# Altium PCB 20251212.PcbDoc
Units mm, origin at the board's own origin, x right, y up, seen from the top; angles counter-clockwise.
Board outline 125 x 100 mm, 2 copper layers (Top Layer, Bottom Layer); 101 components, 65 nets, 339 pads, 4 vias.
Unrouted connection lines stored in the file: 70.
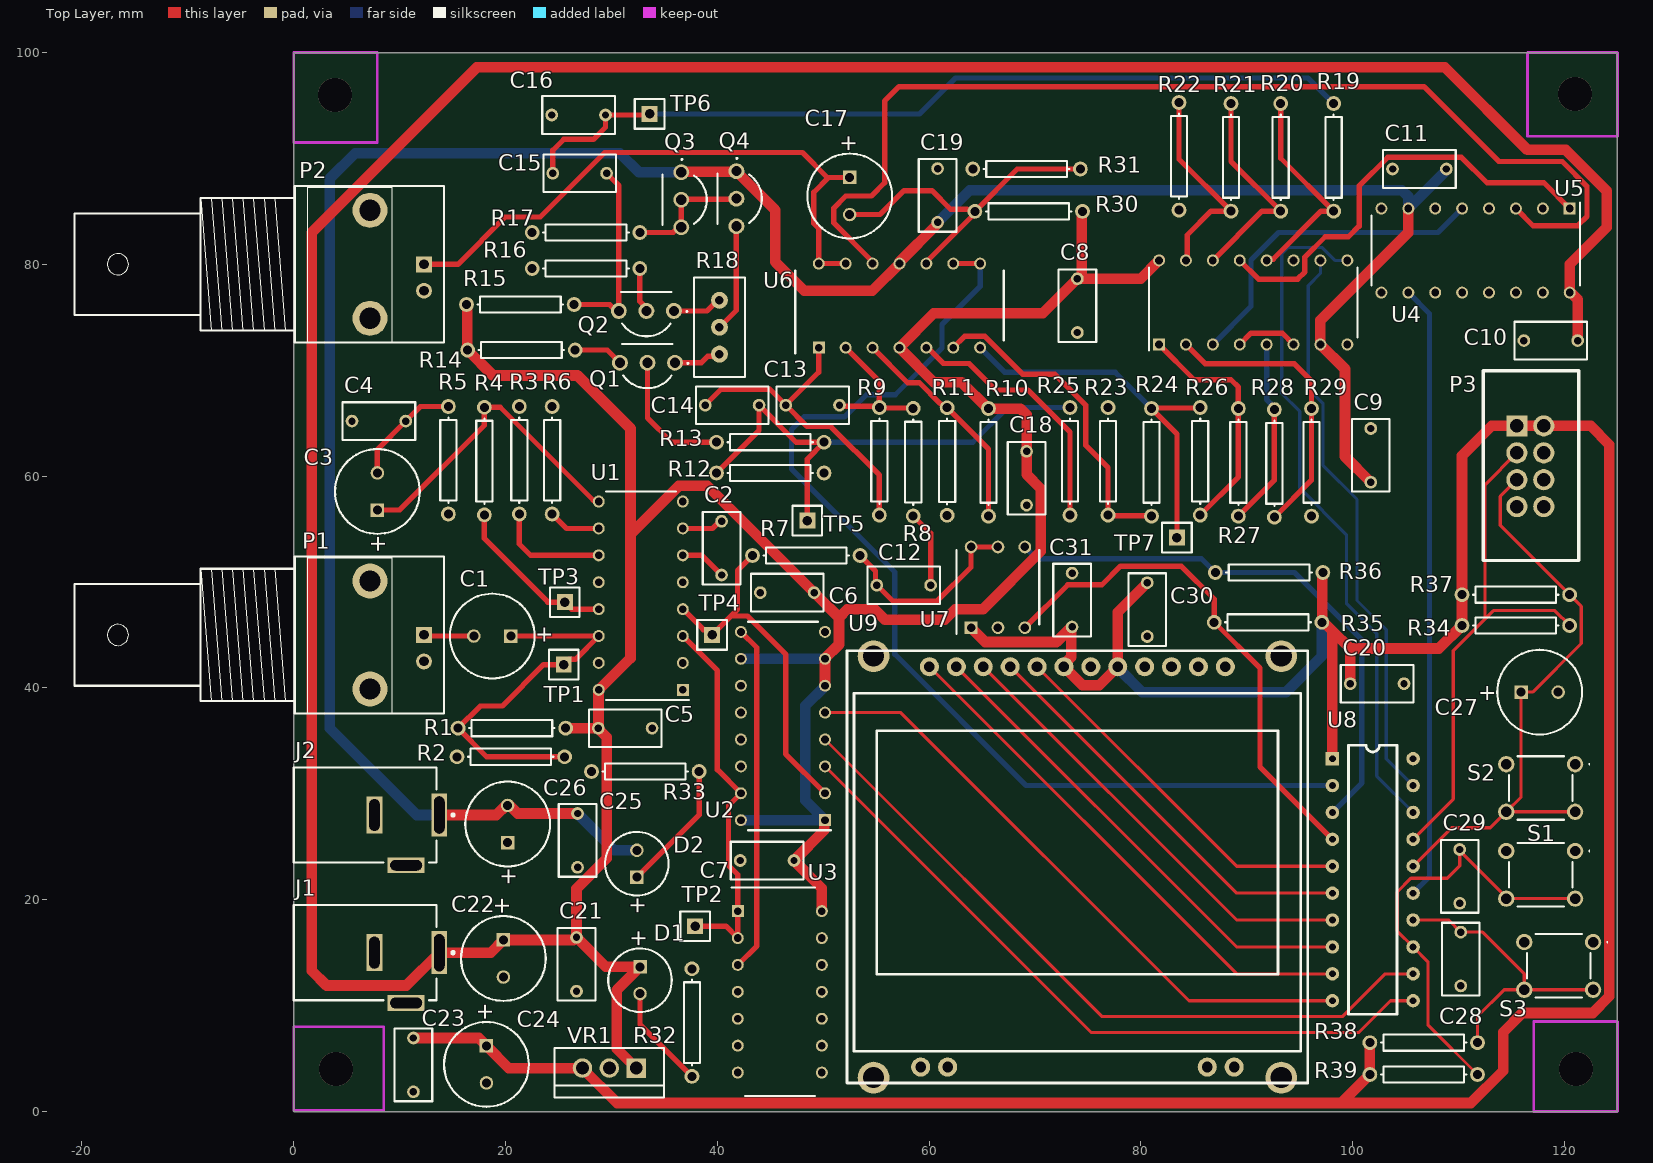
[diagram p0: Top Layer view]
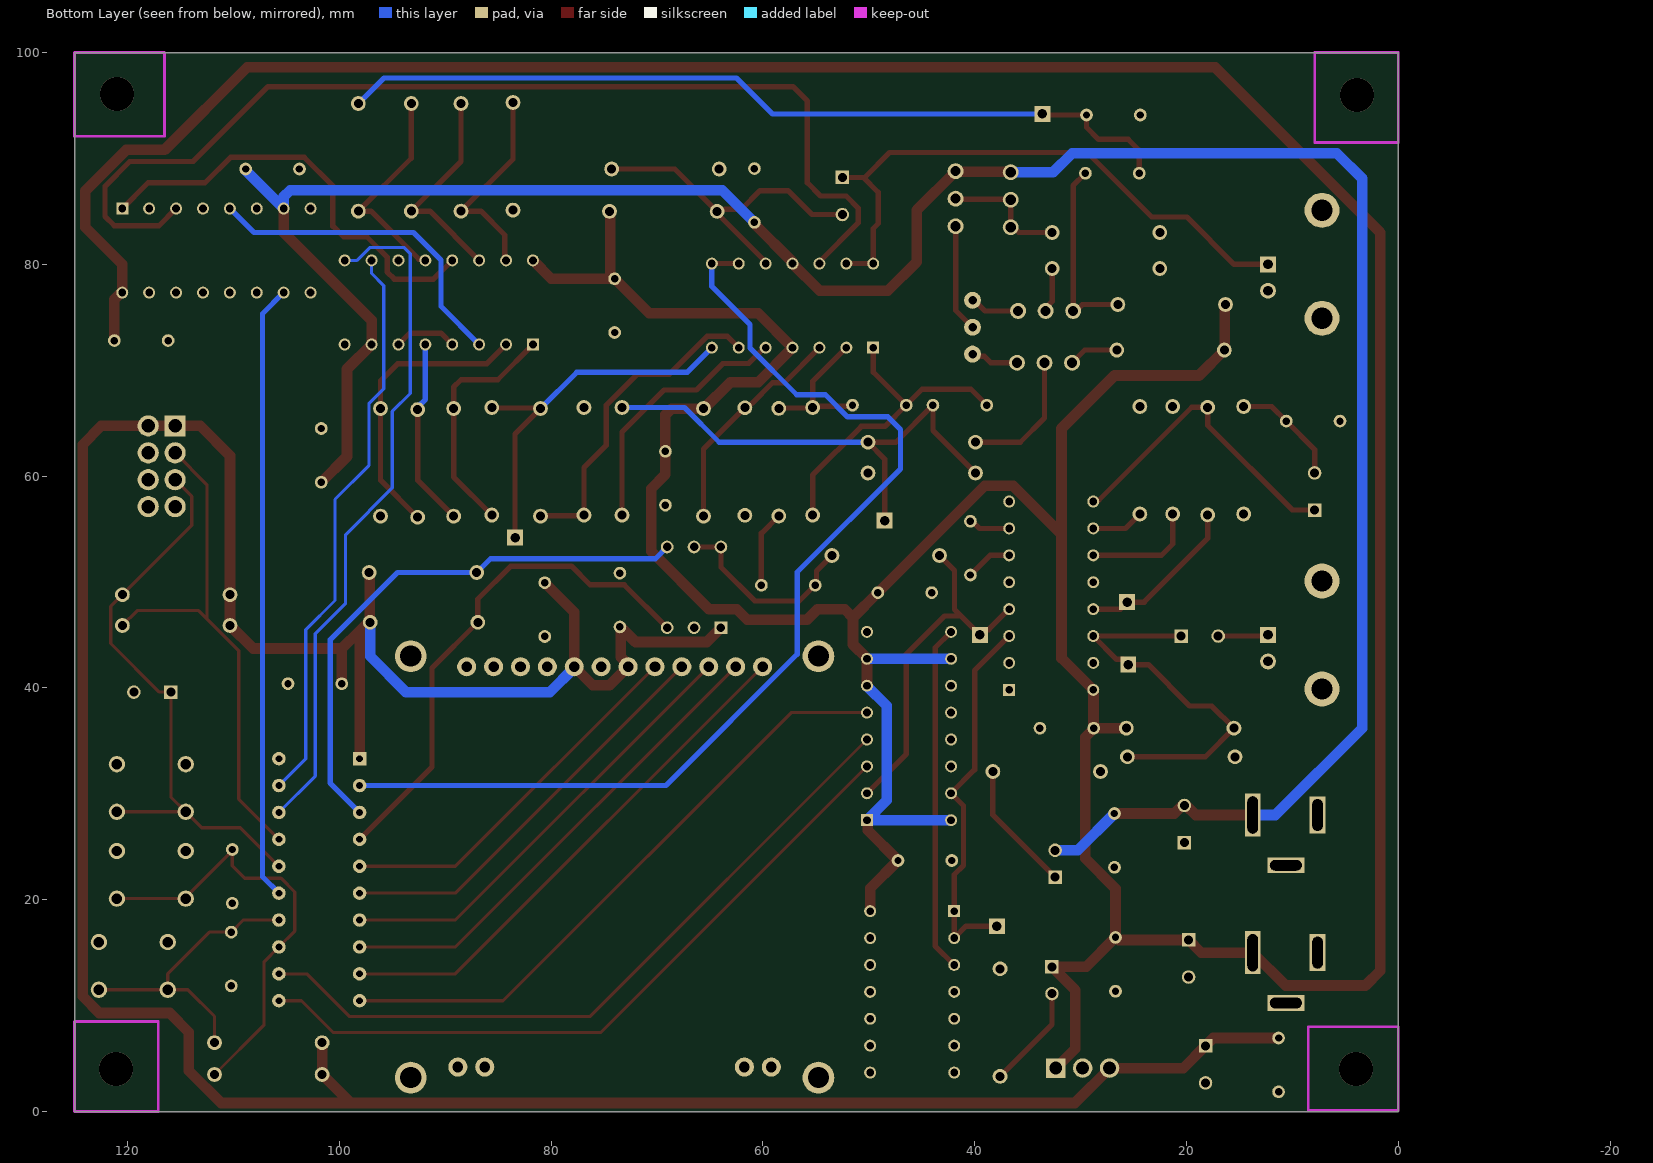
[diagram p1: Bottom Layer view, seen from below]
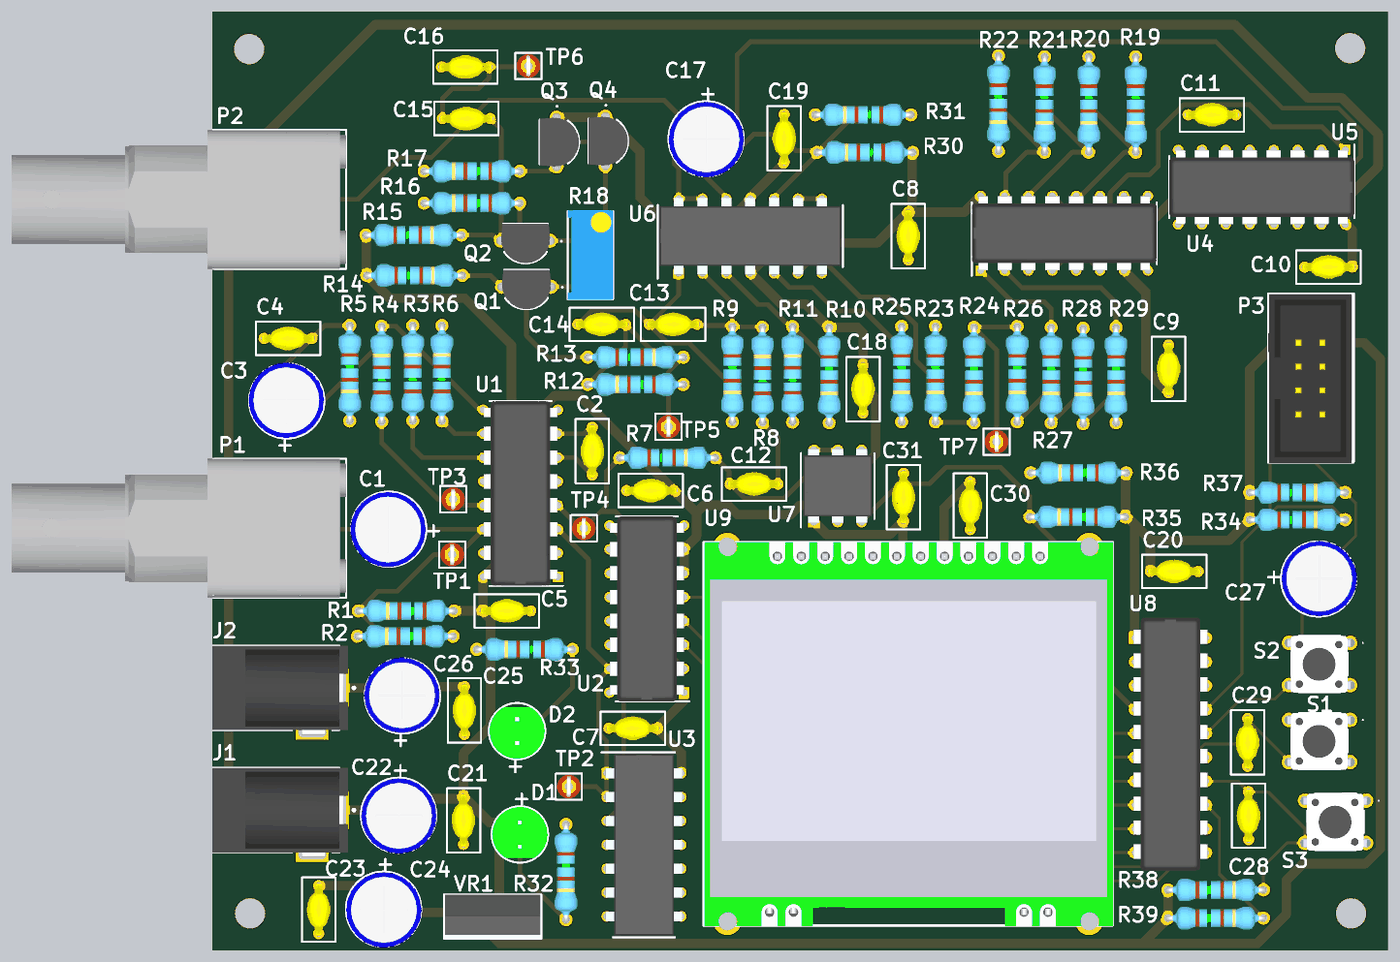
[diagram p2: 3D render of the assembled board from above, using the file's embedded part models]

## Layer stack, top to bottom
Top Solder: solder mask 0.0102, Solder Resist, Dk 3.5
Top Layer: signal copper 0.0356
Dielectric 1: dielectric 0.32, FR-4, Dk 4.8
Bottom Layer: signal copper 0.0356
Bottom Solder: solder mask 0.0102, Solder Resist, Dk 3.5

## Board outline
0,0 0,100 125,100 125,0

## Design rules (kind name [scope] priority, off if disabled: settings)
Clearance Clearance_POWER [InNetClass('POWER')] p1: gap=0.254 ignorepadtopadclearanceinfootprint=FALSE
Clearance Clearance_DIGITAL [InNetClass('DIGITAL') vs InNetClass('DIGITAL')] p2: gap=0.254 ignorepadtopadclearanceinfootprint=FALSE except(0.6: Arc-Arc Arc-Track Track-Track)
Clearance [All] p3: gap=0.254 ignorepadtopadclearanceinfootprint=FALSE except(1: Arc-Arc Arc-Track Track-Track)
PolygonConnect [All] p1: connectstyle=Relief reliefconductorwidth=0.254 reliefentries=4 polygonreliefangle="90 Angle" airgapwidth=0.254
RoutingVias [All] p1: holewidth=0.711 width=1.27 viastyle="Through Hole" minholewidth=0.711 minwidth=1.27 maxholewidth=0.711 maxwidth=1.27
SolderMaskExpansion [All] p1: expansion=0.102 istentingtop=FALSE
SupplyNets "Schematic Supply Nets_4" [InNet('-5')] p1: voltage=0.000
SupplyNets "Schematic Supply Nets_2" [InNet('GND')] p2: voltage=0.000
SupplyNets "Schematic Supply Nets_1" [InNet('3V3')] p3: voltage=0.000
SupplyNets "Schematic Supply Nets" [InNet('+5')] p4: voltage=0.000
Width Width_POWER [InNetClass('POWER')] p1: maxlimit=5 minlimit=0.5 preferedwidth=1
Width Width_DIGITAL [InNetClass('DIGITAL')] p2: maxlimit=2 minlimit=0.25 preferedwidth=0.3
Width [All] p3: maxlimit=2 minlimit=0.3 preferedwidth=0.5
30 further rules are at their usual default settings.

## Classes and differential pairs
net class DIGITAL:  F_CTRL0 F_CTRL1 P13 P14 P15 P16 P20 P21 P25 RST_WTDIO S_CTRL V_CTRL0 V_CTRL1 WTCK
net class POWER: 3V3 +5 -5 GND
component class digital: C20 C21 C22 C23 C24 C25 C26 C27 C28 C29 C30 C31 D1 D2 J1 J2 P3 R32 R33 R34 R35 R36 R37 R38 R39 S1 S2 S3 U8 U9 VR1
component class analog: C1 C2 C3 C4 C5 C6 C7 C8 C9 C10 C11 C12 C13 C14 C15 C16 C17 C18 C19 P1 P2 Q1 Q2 Q3 Q4 R1 R2 R3 R4 R5 R6 R7 R8 R9 R10 R11 R12 R13 R14 R15 R16 R17 R18 R19 R20 R21 R22 R23 R24 R25 R26 R27 R28 R29 R30 R31 TP1 TP2 TP3 TP4 TP5 TP6 TP7 U1 U2 U3 U4 U5 U6 U7

## Components (designator, comment, footprint, x,y, rotation, side; value= is the part's Value field where it differs from the comment)
C1 "ECA-1EEN101" CAPPRD350W65D800H1250 20.5,44.9 r180 top value=100uF/25V
C2 "Cap" RAD-0.2-cap 40.4,53.2 r270 top value=4.7nF
C3 "ECA-1EEN101" CAPPRD350W65D800H1250 7.9,56.8 r90 top value=100uF/25V
C4 "Cap" RAD-0.2-cap 8.04,65.2 r0 top value=100nF
C5 "Cap" RAD-0.2-cap 31.3,36.2 r180 top value=100nF
C6 "Cap" RAD-0.2-cap 46.6,49 r0 top value=100nF
C7 "Cap" RAD-0.2-cap 44.7,23.7 r0 top value=100nF
C8 "Cap" RAD-0.2-cap 74,76.1 r90 top value=100nF
C9 "Cap" RAD-0.2-cap 101.7,61.96 r90 top value=100nF
C10 "Cap" RAD-0.2-cap 118.7,72.8 r0 top value=100nF
C11 "Cap" RAD-0.2-cap 106.3,89 r0 top value=100nF
C12 "Cap" RAD-0.2-cap 57.6,49.7 r0 top value=1uF
C13 "Cap" RAD-0.2-cap 49,66.7 r180 top value=1nF
C14 "Cap" RAD-0.2-cap 41.4,66.7 r0 top value=1uF
C15 "Cap" RAD-0.2-cap 27,88.6 r180 top value=1uF
C16 "Cap" RAD-0.2-cap 26.9,94.1 r180 top value=1nF
C17 "ECA-1EEN101" CAPPRD350W65D800H1250 52.5,88.2 r270 top value=100uF/25V
C18 "Cap" RAD-0.2-cap 69.2,59.8 r90 top value=100nF
C19 "Cap" RAD-0.2-cap 60.8,86.5 r270 top value=100nF
C20 "Cap" RAD-0.2-cap 102.3,40.4 r0 top value=100nF
C21 "Cap" RAD-0.2-cap 26.7,13.9 r90 top value=100nF
C22 "ECA-1EEN101" CAPPRD350W65D800H1250 19.8,16.2 r270 top value=100uF/25V
C23 "Cap" RAD-0.2-cap 11.3,4.4 r90 top value=100nF
C24 "ECA-1EEN101" CAPPRD350W65D800H1250 18.2,6.2 r270 top value=100uF/25V
C25 "Cap" RAD-0.2-cap 26.8,25.6 r90 top value=100nF
C26 "ECA-1EEN101" CAPPRD350W65D800H1250 20.2,25.4 r90 top value=100uF/25V
C27 "ECA-1EEN101" CAPPRD350W65D800H1250 115.9,39.6 r0 top value=100uF/25V
C28 "Cap" RAD-0.2-cap 110.2,14.4 r90 top value=100nF
C29 "Cap" RAD-0.2-cap 110.1,22.2 r90 top value=100nF
C30 "Cap" RAD-0.2-cap 80.6,47.4 r90 top value=100nF
C31 "Cap" RAD-0.2-cap 73.5,48.3 r90 top value=100nF
D1 "LED0" LED-GREEN 32.7,12.4 r270 top
D2 "LED0" LED-GREEN 32.4,23.4 r90 top
J1 "PWR2.5" KOBI-16PJ032_V 7.62,15 r180 top locked
J2 "PWR2.5" KOBI-16PJ032_V 7.62,28 r180 top locked
P1 "BNC" BNC_RA-CON 12.3,45 r0 top locked (schematic designator P?)
P2 "BNC" BNC_RA-CON 12.3,80 r0 top locked
P3 "IDC-8" IDC-8 115.5,64.74 r270 top
Q1 "2N2222" TO-92-3 33.4,70.7 r180 top
Q2 "2N2222" TO-92-3 33.3,75.6 r180 top
Q3 "2N2222" TO-92-3 36.6,86.1 r270 top
Q4 "2N2222" TO-92-3 41.8,86.2 r270 top
R1 "1K" RES-AXIAL-0.4 20.6,36.2 r0 top
R2 "1K" RES-AXIAL-0.4 20.5,33.5 r0 top
R3 "10K" RES-AXIAL-0.4 21.3,61.5 r270 top
R4 "10K" RES-AXIAL-0.4 18,61.42 r270 top
R5 "1K" RES-AXIAL-0.4 14.6,61.5 r90 top
R6 "100K" RES-AXIAL-0.4 24.4,61.5 r270 top
R7 "Res1" RES-AXIAL-0.4 48.4,52.5 r180 top value=75K
R8 "Res1" RES-AXIAL-0.4 58.5,61.32 r270 top value=30K
R9 "Res1" RES-AXIAL-0.4 55.3,61.4 r90 top value=1M
R10 "Res1" RES-AXIAL-0.4 65.6,61.3 r90 top value=20K
R11 "Res1" RES-AXIAL-0.4 61.7,61.38 r270 top value=10K
R12 "Res1" RES-AXIAL-0.4 45,60.3 r0 top value=10K
R13 "Res1" RES-AXIAL-0.4 45,63.2 r180 top value=10K
R14 "Res1" RES-AXIAL-0.4 21.5,71.9 r180 top value=10K
R15 "Res1" RES-AXIAL-0.4 21.4,76.2 r180 top value=10K
R16 "Res1" RES-AXIAL-0.4 27.6,79.6 r0 top value=10K
R17 "Res1" RES-AXIAL-0.4 27.6,83 r0 top value=8.2K
R18 "RPot" 3269W 40.2,74.06 r90 top value=100
R19 "Res1" RES-AXIAL-0.4 98.2,90.1 r90 top value=22K
R20 "Res1" RES-AXIAL-0.4 93.2,90.1 r90 top value=20K
R21 "Res1" RES-AXIAL-0.4 88.5,90.1 r90 top value=20K
R22 "Res1" RES-AXIAL-0.4 83.6,90.2 r90 top value=20K
R23 "Res1" RES-AXIAL-0.4 76.9,61.4 r90 top value=16K
R24 "Res1" RES-AXIAL-0.4 81,61.3 r90 top value=220K
R25 "Res1" RES-AXIAL-0.4 73.3,61.4 r90 top value=10K
R26 "Res1" RES-AXIAL-0.4 85.6,61.4 r90 top value=22K
R27 "Res1" RES-AXIAL-0.4 89.2,61.3 r90 top value=20K
R28 "Res1" RES-AXIAL-0.4 92.6,61.2 r90 top value=20K
R29 "Res1" RES-AXIAL-0.4 96.1,61.3 r90 top value=20K
R30 "Res1" RES-AXIAL-0.4 69.4,85 r0 top value=10K
R31 "Res1" RES-AXIAL-0.4 69.2,89 r0 top value=10K
R32 "Res1" RES-AXIAL-0.4 37.6,8.4 r90 top value=1K
R33 "Res1" RES-AXIAL-0.4 33.2,32.1 r0 top value=1K
R34 "Res1" RES-AXIAL-0.4 115.4,45.9 r180 top value=10K
R35 "Res1" RES-AXIAL-0.4 92,46.2 r0 top value=10K
R36 "Res1" RES-AXIAL-0.4 92.1,50.9 r0 top value=10K
R37 "Res1" RES-AXIAL-0.4 115.4,48.8 r180 top value=1K
R38 "Res1" RES-AXIAL-0.4 106.7,6.5 r180 top value=1K
R39 "Res1" RES-AXIAL-0.4 106.7,3.5 r180 top value=1K
S1 "SW-PB" FSM18JH 121,24.6 r0 top
S2 "SW-PB" FSM18JH 121,32.8 r0 top
S3 "SW-PB" FSM18JH 122.7,16 r0 top
TP1 "TEST-POINT" TP 25.5,42.2 r0 top
TP2 "TEST-POINT" TP 37.9,17.5 r0 top
TP3 "TEST-POINT" TP 25.6,48.1 r0 top
TP4 "TEST-POINT" TP 39.5,45 r0 top
TP5 "TEST-POINT" TP 48.5,55.8 r0 top
TP6 "TEST-POINT" TP 33.6,94.2 r0 top
TP7 "TEST-POINT" TP 83.4,54.2 r0 top
U1 "CD4046BE" DIP794W53P254L1930H508Q16N 32.77,48.71 r180 top
U2 "SN74HC161N" DIP794W53P254L1930H508Q16N 46.2,36.4 r180 top
U3 "SN74HC00N" DIP794W53P254L1930H508Q14N 45.9,11.3 r0 top
U4 "CD4052BE" DIP794W53P254L1930H508Q16N 90.6,76.4 r90 top
U5 "CD4052BE" DIP794W53P254L1930H508Q16N 111.6,81.3 r270 top
U6 "LM324N" DIP794W53P254L1930H508Q14N 57.2,76.1 r90 top
U7 "MCP4018T-103E_LT" DIP762W60P254L730H450Q6N 66.5,49.5 r90 top
U8 "MSP430G2553IN20" "MSP430G2553IN20 - duplicate" 98.08,33.32 r0 top (schematic designator U?)
U9 "JLX128646-086-PC" JLX128646-086-PC 74,23.1 r0 top
VR1 "UA78M33CKCS" TO254P470X1016X1965-3P 32.34,4.1 r180 top

## Footprints (in the part's own frame and the unit in brackets; to place one, negate y for a bottom-side part, rotate by r counter-clockwise, add the part's x,y. Pads: shape width x height; smd on the part's side, far side on the other; paste and mask are expansions set on the pad)
3269W [mm]
  round 1.6 hole 0.8: 1(-2.54,0) 2(0,0) 3(2.54,0)
  silkscreen extent -4.7,-2.41 4.7,2.41, body extent -4.76,-2.4 4.76,2.43, height 11.55
BNC_RA-CON [mm]
  rect 1.5x1.5 hole 0.9: 1(0,0)
  round 3.3 hole 2: 2(-5.1,-5.1) 2(-5.1,5.1)
  round 1.5 hole 0.9: 2(0,-2.5)
  silkscreen extent -33,-7.4 1.9,7.4, body extent -33.66,-7.38 1.9,7.38, height 16.12
CAPPRD350W65D800H1250 [mm]
  rect 1.275x1.275 hole 0.85: 1(0,0)
  round 1.275 hole 0.85: 2(3.5,0)
  silkscreen extent -2.25,-4 5.75,4, body extent -2.21,-3.99 5.84,4.06, height 12.03
DIP762W60P254L730H450Q6N [mm]
  rect 1.2x1.2 hole 0.8: 1(-3.81,2.54)
  round 1.2 hole 0.8: 2(-3.81,0) 3(-3.81,-2.54) 4(3.81,-2.54) 5(3.81,0) 6(3.81,2.54)
  silkscreen extent -4.41,-3.9 3.5,3.9, body extent -3.96,-3.65 3.96,3.65, height 4.5
DIP794W53P254L1930H508Q14N [mm]
  rect 1.13x1.13 hole 0.73: 1(-3.97,7.62)
  round 1.13 hole 0.73: 2(-3.97,5.08) 3(-3.97,2.54) 4(-3.97,0) 5(-3.97,-2.54) 6(-3.97,-5.08) 7(-3.97,-7.62) 8(3.97,-7.62) 9(3.97,-5.08) 10(3.97,-2.54) 11(3.97,0) 12(3.97,2.54) 13(3.97,5.08) 14(3.97,7.62)
  silkscreen extent -4.53,-9.84 3.3,9.84, body extent -4.1,-9.65 4.1,9.65, height 5.08
DIP794W53P254L1930H508Q16N [mm]
  rect 1.13x1.13 hole 0.73: 1(-3.97,8.89)
  round 1.13 hole 0.73: 2(-3.97,6.35) 3(-3.97,3.81) 4(-3.97,1.27) 5(-3.97,-1.27) 6(-3.97,-3.81) 7(-3.97,-6.35) 8(-3.97,-8.89) 9(3.97,-8.89) 10(3.97,-6.35) 11(3.97,-3.81) 12(3.97,-1.27) 13(3.97,1.27) 14(3.97,3.81) 15(3.97,6.35) 16(3.97,8.89)
  silkscreen extent -4.54,-9.84 3.3,9.84, body extent -3.94,-9.84 3.94,9.84, height 4.92
FSM18JH [mm]
  round 1.54 hole 0.99: 1(-6.5,0) 1(0,0) 2(-6.5,-4.5) 2(0,-4.5)
  silkscreen extent -6.25,-5.24 1.4,0.75, body extent -7.17,-5.3 0.57,0.73, height 5.01
IDC-8 [mm]
  rect 2x2 hole 1.27: 1(0,0)
  round 2 hole 1.27: 2(0,2.54) 3(2.54,0) 4(2.54,2.54) 5(5.08,0) 6(5.08,2.54) 7(7.62,0) 8(7.62,2.54)
  silkscreen extent -5.21,-3.17 12.7,5.84, body extent -5.17,-3.23 12.79,5.67, height 9
JLX128646-086-PC [mm] "LCD 128*64"
  round 1.8 hole 1: 1(13.97,18.9) 2(11.43,18.9) 3(8.89,18.9) 4(6.35,18.9) 5(3.81,18.9) 6(1.27,18.9) 7(-1.27,18.9) 8(-3.81,18.9) 9(-6.35,18.9) 10(-8.89,18.9) 11(-11.43,18.9) 12(-13.97,18.9) 13(-14.8,-18.9) 14(-12.26,-18.9) 15(12.26,-18.9) 16(14.8,-18.9)
  round 3 hole 2: 17(19.25,19.9) 18(-19.25,19.9) 19(-19.25,-19.9) 20(19.25,-19.9)
  silkscreen extent -21.75,-20.4 21.75,20.4, body extent -21.84,-20.47 21.81,20.42, height 13.5
KOBI-16PJ032_V [mm]
  rect 1.5x4.05 hole 0.991 slot 3.505 at 90 deg: 1(-6.121,0)
  rect 3.5x1.5 hole 0.991 slot 2.997 at 0 deg: 2(-2.997,4.75)
  rect 1.5x3.5 hole 0.991 slot 2.997 at 90 deg: 3(0,0)
  silkscreen extent -7.55,-4.5 7.62,4.5, body extent -6.78,-4.5 7.62,5, height 11
LED-GREEN [mm]
  rect 1.275x1.275 hole 0.85: 1(-1.27,0)
  round 1.275 hole 0.85: 2(1.27,0)
  silkscreen extent -3,-3 3,3, body extent -2.95,-2.95 2.5,2.95, height 8.84
"MSP430G2553IN20 - duplicate" [mil]
  rect 50x50 hole 25: 1(0,0)
  round 50 hole 25: 2(0,-100) 3(0,-200) 4(0,-300) 5(0,-400) 6(0,-500) 7(0,-600) 8(0,-700) 9(0,-800) 10(0,-900) 11(300,-900) 12(300,-800) 13(300,-700) 14(300,-600) 15(300,-500) 16(300,-400) 17(300,-300) 18(300,-200) 19(300,-100) 20(300,0)
  silkscreen extent 60,-950 240,50, body extent -5,-975 305,85, height 200
RAD-0.2-cap [mm]
  round 1.2 hole 0.7: 1(-2.54,0) 2(2.54,0)
  silkscreen extent -3.43,-1.78 3.43,1.78, body extent -2.8,-1.25 2.8,1.25, height 6
RES-AXIAL-0.4 [mm]
  round 1.4 hole 0.85: 1(-5.08,0) 2(5.08,0)
  silkscreen extent -4.04,-0.76 4.04,0.76, body extent -5.38,-1.2 5.38,1.2, height 2.41
TO254P470X1016X1965-3P [mm]
  rect 1.83x1.83 hole 1.22: 1(0,0)
  round 1.83 hole 1.22: 2(2.54,0) 3(5.08,0)
  silkscreen extent -2.64,-1.91 7.72,2.79, body extent -2.54,-1.91 7.62,2.79, height 19.35
TO-92-3 [mm]
  round 1.5 hole 0.96: 1(-2.6,0) 2(0,0) 3(2.6,0)
  silkscreen extent -3.85,-1.79 2.38,2.4, body extent -3.08,-1.8 3.08,2.39, height 9.78
TP [mm]
  rect 1.5x1.5 hole 0.9: 1(0,0)
  silkscreen extent -1.4,-1.4 1.4,1.4, body extent -1.27,-1.26 1.27,1.26, height 4.88

## Part data
C1 C3 C17 C22 C24 C26 C27: "Capacitor Polarised", Manufacturer_Name=Panasonic, Mouser Part Number=667-ECA-1EEN101, Datasheet Link=https://www.mouser.in/datasheet/2/315/ABA0000C1044-947503.pdf, Height=12.5mm, Manufacturer_Part_Number=ECA-1EEN101, Mouser Price/Stock=https://www.mouser.co.uk/ProductDetail/Panasonic/ECA-1EEN101?qs=tfZGHB2PWd0NYnCl82fG3g%3D%3D
C2 C4 C5 C6 C7 C8 C9 C10 C11 C12 C13 C14 C15 C16 C18 C19 C20 C21 C23 C25 C28 C29 C30 C31: "Capacitor", LatestRevisionDate=17-Jul-2002, LatestRevisionNote="Re-released for DXP Platform.", PackageDescription="Radial Cap, Thru-Hole; 2 Leads; 0.3 in Pin Spacing", PackageReference=RAD-0.3, Published=8-Jun-2000, Publisher="Altium Limited"
D1 D2: "Typical INFRARED GaAs LED", LatestRevisionDate=08-Jul-2005, LatestRevisionNote="Mech Layer 1 removed.", PackageDescription="LED; 2 Leads", PackageReference=LED-0, Published=8-Jun-2000, Publisher="Altium Limited"
J1 J2: "Low Voltage Power Supply Connector", ComponentLink1Description="Manufacturer Link", ComponentLink1URL=http://domino.kycon.com/internet/Products.html, DatasheetDocument=09-May-2002, Published=17-Dec-2003, Publisher="Altium Limited"
P1 P2: "BNC Elbow Connector", LatestRevisionDate=17-Jul-2002, LatestRevisionNote="Re-released for DXP Platform.", Publisher="Altium Limited"
P3: "Header, 4-Pin, Dual row", LatestRevisionDate=17-Jul-2002, LatestRevisionNote="Re-released for DXP Platform.", Publisher="Altium Limited"
Q1 Q2 Q3 Q4: "Transistor BJT NPN", Arrow Part Number=SS8050CTA, Manufacturer_Name=onsemi, Mouser Part Number=512-SS8050CTA, Arrow Price/Stock=https://www.arrow.com/en/products/ss8050cta/on-semiconductor?region=europe, Datasheet Link=http://www.onsemi.com/pub/Collateral/SS8050-D.pdf, Manufacturer_Part_Number=SS8050CTA, Mouser Price/Stock=https://www.mouser.co.uk/ProductDetail/ON-Semiconductor-Fairchild/SS8050CTA?qs=UMEuL5FsraCvGU9pAIJ0vg%3D%3D
R1 R2 R3 R4 R5 R6: library part Res1, "Resistor", LatestRevisionDate=17-Jul-2002, LatestRevisionNote="Re-released for DXP Platform.", PackageDescription="Axial Device, Thru-Hole; 2 Leads; 0.3 in Pin Spacing", PackageReference=AXIAL-0.3, Published=8-Jun-2000, Publisher="Altium Limited"
R8 R9 R10 R11 R12 R13 R14 R15 R16 R17 R19 R20 R21 R22 R23 R24 R25 R26 R27 R28 R29 R30 R31 R32 R33 R34 R35 R36 R37 R38 R39: "Resistor", LatestRevisionDate=17-Jul-2002, LatestRevisionNote="Re-released for DXP Platform.", PackageDescription="Axial Device, Thru-Hole; 2 Leads; 0.3 in Pin Spacing", PackageReference=AXIAL-0.3, Published=8-Jun-2000, Publisher="Altium Limited"
R18: "Potentiometer", LatestRevisionDate=17-Jul-2002, LatestRevisionNote="Re-released for DXP Platform.", PackageDescription="Variable Resistor, Thru-Hole; 3 Leads", PackageReference=VR5, Published=8-Jun-2000, Publisher="Altium Limited", Set Position=0.5, Sim Note="Enter the Resistance value and the set point into parameter fields."
S1 S2 S3: "Switch", LatestRevisionDate=17-Jul-2002, LatestRevisionNote="Re-released for DXP Platform.", PackageDescription="Switch; 2 Leads", PackageReference=SPST-2, Published=24-Mar-1999, Publisher="Altium Limited"
TP1 TP2 TP3 TP4 TP5 TP6 TP7: library part TP, "Socket", LatestRevisionDate=17-Jul-2002, LatestRevisionNote="Re-released for DXP Platform.", Publisher="Altium Limited"
U1: "Integrated Circuit", Manufacturer_Name="Texas Instruments", Mouser Part Number=595-CD4046BE, Arrow Part Number=CD4046BE, Arrow Price/Stock=https://www.arrow.com/en/products/cd4046be/texas-instruments?utm_currency=USD&region=europe, Datasheet Link=http://www.ti.com/lit/gpn/cd4046b, Height=5.08mm, Manufacturer_Part_Number=CD4046BE, Mouser Price/Stock=https://www.mouser.co.uk/ProductDetail/Texas-Instruments/CD4046BE?qs=fvkeCqCHl3AX2sxIYB2bdg%3D%3D
U2: "Integrated Circuit", Manufacturer_Name="Texas Instruments", Mouser Part Number=595-SN74HC161N, Arrow Part Number=SN74HC161N, Arrow Price/Stock=https://www.arrow.com/en/products/sn74hc161n/texas-instruments, Datasheet Link=http://www.ti.com/lit/gpn/sn74hc161, Height=5.08mm, Manufacturer_Part_Number=SN74HC161N, Mouser Price/Stock=https://www.mouser.co.uk/ProductDetail/Texas-Instruments/SN74HC161N?qs=bvpNxolhIUP7VQyQMWPUIQ%3D%3D
U3: "Integrated Circuit", Manufacturer_Name="Texas Instruments", Mouser Part Number=595-SN74HC00N, Arrow Part Number=SN74HC00N, Arrow Price/Stock=https://www.arrow.com/en/products/sn74hc00n/texas-instruments?utm_currency=USD&region=nac, Datasheet Link=http://componentsearchengine.com/Datasheets/3/SN74HC00N.pdf, Height=5.08mm, Manufacturer_Part_Number=SN74HC00N, Mouser Price/Stock=https://www.mouser.co.uk/ProductDetail/Texas-Instruments/SN74HC00N?qs=st7IWvlL5%2FiRVQxNj4BeMw%3D%3D
U4 U5: "Integrated Circuit", Manufacturer_Name="Texas Instruments", Mouser Part Number=595-CD4052BE, Arrow Part Number=CD4052BE, Arrow Price/Stock=https://www.arrow.com/en/products/cd4052be/texas-instruments?region=nac, Datasheet Link=http://www.ti.com/lit/gpn/cd4052b, Height=5.08mm, Manufacturer_Part_Number=CD4052BE, Mouser Price/Stock=https://www.mouser.co.uk/ProductDetail/Texas-Instruments/CD4052BE?qs=Tv815z3GeNSSxm5loQgO7w%3D%3D
U6: "Quadruple Operational Amplifier", ComponentLink1Description="Manufacturer Link", ComponentLink1URL=http://www.ti.com/, ComponentLink2Description=Datasheet, ComponentLink2URL=http://www-s.ti.com/sc/ds/lm324.pdf, DatasheetVersion=Feb-1997, LatestRevisionDate=04-Mar-2005, LatestRevisionNote="Stylized 3D Model Added.", PackageDescription="DIP; 14 Leads; Row Spacing 7.62 mm; Pitch 2.54 mm", PackageReference=N014, PackageVersion=Oct-1995, Published=16-Jan-2001, Publisher="Altium Limited"
U7: "Integrated Circuit", Arrow Part Number=MCP4018T-103E/LT, Manufacturer_Name=Microchip, Mouser Part Number=579-MCP4018T103E/LT, Arrow Price/Stock=https://www.arrow.com/en/products/mcp4018t-103elt/microchip-technology?region=nac, Datasheet Link=https://datasheet.datasheetarchive.com/originals/distributors/Datasheets-DGA14/624353.pdf, Height=1.1mm, Manufacturer_Part_Number=MCP4018T-103E/LT, Mouser Price/Stock=https://www.mouser.co.uk/ProductDetail/Microchip-Technology/MCP4018T-103E-LT?qs=%2FsslhGPpiOSWJSDZcNYXEg%3D%3D
U8: library part MSP430G2553, "混合处理器"
U9: "LCD 128*64"
VR1: "Voltage Regulator", LatestRevisionDate=29-May-2009, LatestRevisionNote="IPC-7351 Footprint Added.", PackageDescription="3-Pin Transistor Outline Package 2.54 mm Pitch, 15.1 mm Lead Span", PackageReference=D2PAK, Published=24-Mar-1999, Publisher="Altium Limited"
R7: LatestRevisionDate=17-Jul-2002, LatestRevisionNote="Re-released for DXP Platform.", PackageDescription="Axial Device, Thru-Hole; 2 Leads; 0.3 in Pin Spacing", PackageReference=AXIAL-0.3, Published=8-Jun-2000, Publisher="Altium Limited"

## Via types
v1: diameter 3.2, hole 3.2, Top Layer to Bottom Layer, 4 vias

## Nets (pads, with @x,y where several pads share a name; then routed paths per layer and width w, separated by ;. In a path a pad name is that pad's centre, name@x,y a point inside that pad or via, vN(x,y) a via of type N, cw(c..) or ccw(c..) an arc to the next point about the centre after c; other vN are vias at no path point)
3V3: C20.1 C23.2 C24.1 C30.2 C31.1 P3.1 P3.2 R34.2 R35.2 R36.2 R37.2 R38.2 R39.2 U7.1 U8.1 U9.5 U9.7 VR1.3 | length 303.2
  Top Layer w0.5: R36.2@97.13,50.95 R36.2 ; R38.2 R38.2@101.67,6.45
  Top Layer w1: C23.2 17.46,6.94 C24.1 20.3,4.1 VR1.3 30.56,0.8 98.92,0.8 ; U7.1 65.314,44.336 72.022,44.336 73.446,45.76 C31.1 ; U9.7@72.664,42.066 72.664,42.15 73.434,42.92 73.434,45.552 73.462,45.58 73.462,45.668 C31.1@73.435,45.695 ; U9.7 74.484,40.246 76.056,40.246 U9.5 77.81,47.15 C30.2 ; R35.2 97.13,46.25 R35.2@97.13,46.35 ; R36.2 97.13,50.85 R35.2@97.13,46.35 ; U8.1 98.08,45.4 ; C20.1 99.76,43.72 ; R38.2 R39.2 98.92,0.8 ; R35.2@97.13,46.35 98.08,45.4 ; 98.08,45.4 99.76,43.72 ; 98.92,0.8 111.136,0.8 114.2,3.864 114.2,7.5 116,9.3 122.655,9.3 124.224,10.869 124.224,62.976 122.46,64.74 P3.2 P3.1 113.14,64.74 110.32,61.92 R37.2 R34.2 108.14,43.72 99.76,43.72
  Bottom Layer w1: U9.5@77.81,41.99 77.833,41.967 77.833,41.877 80.11,39.6 93.7,39.6 97.08,42.98 R35.2
: U2.5 U8.10 | length 59.2
  Top Layer w0.3: U2.5 57.33,37.67 84.54,10.46 U8.10
PD_OUT: R4.2 TP3.1 U1.13 | length 15.8
  Top Layer w0.5: R4.2 18,54.1 24,48.1 TP3.1 26.26,47.44 U1.13
SIN: C15.2 C16.1 R19.2 TP6.1 | length 80.4
  Top Layer w0.5: C15.2 24.46,90.76 25.5,91.8 28.3,91.8 29.44,92.94 C16.1 33.5,94.1 TP6.1
  Bottom Layer w0.5: TP6.1 59.1,94.2 62.5,97.6 95.78,97.6 R19.2
+5: C5.2 C6.2 C7.2 C8.2 C10.2 C18.2 C21.2 C22.1 D1.1 J1.1 R1.2 R10.2 R14.2 R15.2 R30.2 U1.16 U2.1 U2.6 U2.7 U2.10 U2.16 U3.14 U4.16 U5.16 U6.4 VR1.1 | length 500.9
  Top Layer w1: R15.2 16.37,76.15 16.37,71.95 R14.2 18.817,69.503 26.797,69.503 31.8,64.5 31.8,54.525 ; R1.2 C5.2 ; 31.729,42.749 U1.16 28.78,39.8 28.78,36.22 C5.2 ; 31.8,42.82 31.8,54.525 ; VR1.1 30.5,5.94 30.5,11.47 D1.1 29.47,13.67 C21.2 ; U3.14 49.87,21.07 C7.2 50.105,26.565 50.105,27.445 U2.1 ; U2.6 U2.7 50.17,42.785 51.489,44.104 51.489,46.651 ; 74.403,79.135 74.403,84.923 R30.2 ; U4.16@81.77,80.37 U4.16 79.98,78.64 C8.2 70.74,75.38 60.45,75.38 U6.4 60.45,68.88 63.055,68.88 65.555,66.38 68.614,66.38 69.2,65.794 C18.2 69.2,60.169 70.554,58.815 70.554,52.909 65.085,47.44 62.476,47.44 61.486,46.45 55.835,46.45 54.845,47.44 52.278,47.44 51.489,46.651 ; U5.16@120.43,77.305 120.614,77.305 121.24,76.679 C10.2@121.24,72.854 ; U5.16 120.49,80.012 123.978,83.5 123.978,86.923 120.101,90.8 116.5,90.8 108.7,98.6 17.3,98.6 1.7,83 1.7,13.3 3.1,11.9 10.641,11.9 J1.1 18.6,15 C22.1 26.406,16.2 26.646,16.44 C21.2 ; C21.2 26.7,21.045 29.574,23.919 29.574,35.332 28.76,36.146 C5.2 ; 31.8,54.525 36.375,59.1 39.04,59.1 C6.2 51.489,46.651
  Bottom Layer w1: U2.16 U2.1 48.3,29.38 48.3,38.305 50.17,40.175 U2.6 ; U2.10 U2.7
-5: C9.1 C11.2 C19.2 C25.2 C26.2 D2.2 J2.1 Q3.1 Q4.1 U4.7 U5.7 U6.11 | length 239.7
  Top Layer w0.5: C26.2@20.038,28.9 C26.2 C26.2@20.41,28.9 ; U6.11 U6.11@57.2,80.215 ; C19.2@60.8,83.815 C19.2
  Top Layer w1: J2.1 19.138,28 C26.2@20.038,28.9 ; C26.2@20.41,28.9 21.17,28.14 C25.2 ; Q3.1 36.65,88.75 41.75,88.75 Q4.1 45.475,85.125 45.475,80.225 48.2,77.5 54.63,77.5 U6.11 ; U6.11@57.2,80.215 C19.2@60.8,83.815 ; C19.2@60.762,83.998 C19.2 ; C9.1 99.268,61.852 99.268,70.112 U4.7 96.95,74.7 105.25,83 U5.7
  Bottom Layer w1: J2.1 11.6,28 3.4,36.2 3.4,88.1 5.8,90.5 30.8,90.5 32.6,88.7 Q3.1 ; C25.2 30.27,24.67 D2.2 ; Q4.1@41.75,88.75 Q4.1 ; C19.2 63.84,87 104.639,87 105.225,86.414 105.225,85.295 U5.7 108.802,88.822 108.802,88.962 C11.2
AD_Y: U6.8 U6.9 U8.2 | length 101.1
  Top Layer w0.5: U6.9 U6.8
  Bottom Layer w0.5: U6.8 64.82,77.92 61.211,74.311 61.211,72.089 56.806,67.684 54.085,67.684 51.997,65.596 48.196,65.596 47,64.4 47,60.683 56.754,50.929 56.754,43.19 69.164,30.78 U8.2
COMP_IN: TP2.1 U1.3 U2.15 U3.1 U3.2 | length 36.1
  Top Layer w0.5: U1.3 40,41.64 40,32.28 U2.15 41.056,28.876 41.056,23.243 41.93,22.369 U3.1 U3.2 40.81,17.5 TP2.1
F_CTRL0: U2.3 U8.11 | length 67.2
  Top Layer w0.3: U2.3 75.3,7.46 100.569,7.46 103.569,10.46 U8.11
F_CTRL1: U2.4 U8.12 | length 68
  Top Layer w0.3: U2.4 76.34,8.96 99.029,8.96 103.069,13 U8.12
GND: C4.1 C5.1 C6.1 C7.1 C8.1 C9.2 C10.1 C11.1 C16.2 C18.1 C19.1 C20.2 C21.1 C22.2 C23.1 C24.2 C25.1 C26.1 C27.2 C28.1 C29.1 C30.1 C31.2 J1.2 J1.3 J2.2 J2.3 P1.2 P2.2 P3.7 P3.8 R2.1 R3.1 R5.1 R6.1 R11.2 R12.2 R16.1 R17.1 R22.1 R23.2 R29.1 R31.1 R32.2 R33.1 S1.1 S2.1 S3.1 U1.5 U1.8 U2.8 U3.7 U4.4 U4.6 U4.8 U4.11 U5.2 U5.4 U5.6 U5.8 U5.9 U7.2 U8.20 U9.6 VR1.2 | length 6
  Top Layer w0.5: U4.4 90.399,73.499 93.341,73.499 U4.6
IN: C1.2 P1.1 | length 4.7
  Top Layer w0.5: P1.1 12.4,44.9 C1.2
NetC2_1: C2.1 U1.7 | length 3.9
  Top Layer w0.5: U1.7 39.531,55.06 40.211,55.74 C2.1
NetC2_2: C2.2 U1.6 | length 4.4
  Top Layer w0.5: U1.6 38.54,52.52 C2.2
NetC3_2: C3.2 C4.2 R5.2 | length 10.6
  Top Layer w0.5: C3.2 7.9,62.52 C4.2 11.96,66.58 R5.2
NetC12_1: C12.1 R7.1 U7.5 U7.6 | length 18.8
  Top Layer w0.5: R7.1 54.93,51.05 54.93,49.83 C12.1 56.56,48.2 60.761,48.2 63.96,51.399 U7.6 U7.5
NetC12_2: C12.2 R8.2 | length 7.2
  Top Layer w0.5: R8.2 60.14,54.6 C12.2
NetC13_1: C13.1 R8.1 R9.2 U6.2 | length 14.1
  Top Layer w0.5: C13.1 51.65,66.59 55.19,66.59 R9.2 ; U6.2 55.3,68.95 R9.2 ; R8.1 58.46,66.44 55.34,66.44 R9.2
NetC13_2: C13.2 C14.1 R9.1 U6.1 | length 30.9
  Top Layer w0.5: C14.1 40.36,68.2 44.96,68.2 C13.2 ; U6.1 49.58,69.82 C13.2 ; R9.1 55.3,60.101 50.701,64.7 48.46,64.7 C13.2
NetC15_1: C15.1 Q2.3 R15.1 | length 17.9
  Top Layer w0.5: R15.1 29.829,76.2 30.429,75.6 Q2.3 30.7,87.44 C15.1
NetC17_2: C17.2 R30.1 R31.2 U6.10 | length 32
  Top Layer w0.5: C17.2 55.365,84.7 57.622,86.957 60.278,86.957 62.035,85.2 63.577,85.2 63.605,85.172 64.148,85.172 R30.1 ; U6.10 59.74,80.24 64.32,84.82 R30.1 ; R31.2 68.32,89 R30.1
NetD1_2: D1.2 R32.1 | length 9.8
  Top Layer w0.5: D1.2 32.7,8.22 R32.1
NetD2_1: D2.1 R33.2 | length 12.4
  Top Layer w0.5: D2.1 38.28,28.01 R33.2
NetQ1_1: Q1.1 R18.1 | length 4.5
  Top Layer w0.5: Q1.1 38.474,70.7 39.084,71.31 39.99,71.31 R18.1
NetQ1_2: Q1.2 R13.2 | length 12.7
  Top Layer w0.5: Q1.2 33.4,65.5 35.7,63.2 R13.2
NetQ1_3: Q1.3 R14.1 | length 4.7
  Top Layer w0.5: R14.1 29.6,71.9 Q1.3
NetQ2_1: Q2.1 R18.3 | length 4.7
  Top Layer w0.5: Q2.1 39.008,75.6 40.008,76.6 R18.3
NetQ2_2: Q2.2 R16.2 | length 4.3
  Top Layer w0.5: R16.2 32.68,76.491 33.3,75.871 Q2.2
NetQ3_2: Q3.2 Q3.3 Q4.2 R17.2 | length 12
  Top Layer w0.5: R17.2 35.829,83 36.329,83.5 Q3.3 Q3.2 36.65,86.15 41.75,86.15 Q4.2
NetQ4_3: Q4.3 R18.2 | length 10.2
  Top Layer w0.5: R18.2 41.8,75.66 Q4.3
NetR3_2: R3.2 U1.11 | length 10.8
  Top Layer w0.5: R3.2 21.3,53.6 22.38,52.52 28.62,52.52 28.7,52.6 28.72,52.6 U1.11
NetR6_2: R6.2 U1.10 | length 5.2
  Top Layer w0.5: R6.2@24.644,56.42 R6.2 25.76,55.06 U1.10
NetR10_1: R10.1 R11.1 U6.3 | length 21.2
  Top Layer w0.5: U6.3 57.969,68.821 59.079,68.821 61.045,66.855 61.061,66.855 61.284,66.632 61.528,66.632 65.6,62.56 R10.1
NetR23_1: R23.1 R24.1 U6.6 | length 31
  Top Layer w0.5: U6.6 63.349,73.199 65.263,73.199 68.832,69.63 71.853,69.63 74.8,66.683 74.8,62.9 76.9,60.8 R23.1 76.95,56.27 80.95,56.27 R24.1
NetR24_2: R24.2 R26.2 TP7.1 U6.7 | length 36.4
  Top Layer w0.5: TP7.1 83.4,63.98 R24.2 81.05,66.43 85.55,66.43 R26.2
  Bottom Layer w0.5: U6.7 67.15,69.8 77.58,69.8 R24.2
NetR25_1: R25.1 U6.5 | length 24.7
  Top Layer w0.5: U6.5 59.841,72.13 61.341,70.63 63.78,70.63 66.28,68.13 69.339,68.13 73.3,64.169 R25.1
NetU2_9: U2.9 U3.3 | length 32.8
  Top Layer w0.5: U3.3 43.73,15.64 43.73,43.79 U2.9
P13: U8.5 U9.8 | length 35.7
  Top Layer w0.3: U9.8 89.03,23.16 U8.5
P14: U8.6 U9.9 | length 39.3
  Top Layer w0.3: U9.9 89.03,20.62 U8.6
P15: U8.7 U9.10 | length 42.9
  Top Layer w0.3: U9.10 89.03,18.08 U8.7
P16: C28.2 R38.1 S3.2 U8.14 | length 28.5
  Top Layer w0.3: U8.14 109.06,18.08 C28.2 112.26,16.94 116.2,13 116.2,11.5 S3.2@122.7,11.5 ; R38.1 111.78,8.98 114.3,11.5 S3.2@115.64,11.5
  Top Layer w0.5: S3.2@115.64,11.5 S3.2@116.2,11.5
P20: U8.8 U9.11 | length 46.5
  Top Layer w0.3: U9.11 89.03,15.54 U8.8
P21: U8.9 U9.12 | length 50.1
  Top Layer w0.3: U9.12 89.03,13 U8.9
P25: C29.2 R39.1 S1.2 U8.13 | length 41.7
  Top Layer w0.3: R39.1 107.1,8.18 107.1,9.88 107.1,13.58 107.1,14.14 U8.13 104.2,17.04 104.2,20.731 105.49,22.021 108.921,22.021 110.1,23.2 110.1,24.62 S1.2@114.5,20.22 ; S1.2@114.5,20.1 S1.2@121,20.1
  Top Layer w0.5: C29.2@110.1,24.62 C29.2 ; S1.2@114.5,20.1 S1.2@114.5,20.22
RST_WTDIO: C27.1 P3.5 R37.1 S2.2 U8.16 | length 56.2
  Top Layer w0.3: U8.16 109.34,26.8 113,26.8 S2.2@114.5,28.3 ; P3.5 113.924,58.084 113.924,55.356 R37.1 121.584,47.696 121.584,44.196 116.988,39.6 C27.1 115.9,29.7 S2.2@114.5,28.3 ; S2.2@121,28.3 S2.2@114.5,28.3
S_CTRL: U5.10 U8.15 | length 58.2
  Bottom Layer w0.5: U5.10 107.25,75.33 107.25,22.17 U8.15
SCL: R35.1 U7.3 U8.4 | length 48.9
  Top Layer w0.5: U7.3 73.086,49.736 76.302,49.736 78.066,51.5 83.8,51.5 86.92,48.38 R35.1 91.246,41.874 91.246,32.534 U8.4
SDA: R36.1 U7.4 U8.3 | length 52.9
  Bottom Layer w0.5: U7.4 70.15,52.2 85.72,52.2 R36.1 94.501,50.9 100.864,44.537 100.864,31.024 U8.3
SIG_IN: C1.1 R1.1 R2.2 TP1.1 U1.14 | length 36.4
  Top Layer w0.5: C1.1 U1.14 26.6,42.7 26,42.7 TP1.1 23.6,42.2 19.7,38.3 17.62,38.3 R1.1 18.22,33.5 R2.2
SIG_OUT: C17.1 P2.1 U6.13 U6.14 | length 57
  Top Layer w0.5: P2.1 15.5,80 19.959,84.459 23.278,84.459 29.369,90.55 48.029,90.55 50.379,88.2 50.5,88.2 ; U6.13 U6.14 49.58,83.377 49.1,83.857 49.1,86.8 50.5,88.2 ; C17.1 50.5,88.2
TRI: C14.2 R12.1 R13.1 R25.2 TP5.1 | length 48.3
  Top Layer w0.5: R12.1 43.94,64.32 C14.2 47.44,63.2 R13.1 48.5,61.62 TP5.1
  Bottom Layer w0.5: R13.1 64.123,63.2 67.403,66.48 R25.2
V_CTRL0: U4.10 U8.19 | length 54.2
  Bottom Layer w0.3: U4.10 96.95,79.135 95.8,77.985 95.8,68.241 97.204,66.837 97.204,60.996 100.4,57.8 100.4,48.254 103.164,45.49 103.164,33.316 U8.19
V_CTRL1: U4.9 U8.18 | length 64.8
  Bottom Layer w0.3: U4.9 98.32,80.37 97.09,81.6 93.9,81.6 93.3,81 93.3,67.803 94.996,66.107 94.996,58.885 99.4,54.481 99.4,47.981 102.264,45.117 102.264,31.676 U8.18
VCO_IN: C3.1 R4.1 U1.9 | length 29.6
  Top Layer w0.5: C3.1 10,56.8 18,64.8 R4.1 19.5,66.5 28.279,57.721 28.679,57.721 U1.9
VCO_OUT: R7.2 TP4.1 U1.4 U2.2 | length 34.2
  Top Layer w0.5: U1.4 38.68,45.5 39,45.5 TP4.1 41.29,46.79 ; R7.2 41.9,51.08 41.9,47.4 41.29,46.79 ; U2.2 46.45,33.77 46.45,43.191 42.851,46.79 41.29,46.79
WTCK: P3.3 R34.1 U8.17 | length 49.4
  Top Layer w0.3: U8.17 109.5,29.5 109.5,43.519 112.5,46.519 ; P3.3 112.5,59.2 112.5,46.519 ; R34.1 119.08,47.3 113.281,47.3 112.5,46.519
X0_IN: R19.1 R20.2 U4.12 | length 20.5
  Top Layer w0.5: U4.12 91.991,80.491 92.491,80.491 97.02,85.02 R19.1 93.2,90.02 R20.2
X1_IN: R20.1 R21.2 U4.14 | length 20.6
  Top Layer w0.5: U4.14@86.79,80.54 U4.14 91.44,85.02 R20.1 88.5,89.72 R21.2
X2_IN: R21.1 R22.2 U4.15 | length 19.8
  Top Layer w0.5: R22.2 83.6,89.92 R21.1 86.62,85.02 84.371,82.771 84.371,80.491 U4.15
X_OUT: U4.13 U5.1 | length 41.9
  Top Layer w0.5: U4.13 91.1,78.6 94.8,78.6 95.479,79.279 95.479,80.679 97.406,82.606 99.606,82.606 100.605,83.605 100.605,87.406 103.303,90.104 110.279,90.104 112.683,87.7 118.06,87.7 U5.1@120.618,85.142
XYOUT: U5.3 U6.12 | length 101.6
  Top Layer w0.5: U6.12 54.66,80.24 51,83.9 51,85.321 52.129,86.45 54.55,86.45 55.8,87.7 55.8,95.407 57.173,96.78 106.72,96.78 113.8,89.7 119.781,89.7 122.118,87.363 122.118,84.52 121.24,83.642 117.038,83.642 U5.3 U5.3@115.41,85.281
Y0_IN: R26.1 R27.2 U4.1 | length 22.7
  Top Layer w0.5: U4.1 85.04,69.1 88.5,69.1 89.2,68.4 R27.2 89.2,59.92 R26.1
Y1_IN: R27.1 R28.2 U4.5 | length 17.9
  Top Layer w0.5: R27.1 92.6,59.62 R28.2
  Bottom Layer w0.5: U4.5 91.87,67.254 92.6,66.524 R28.2
Y2_IN: R28.1 R29.2 U4.2 | length 27.6
  Top Layer w0.5: U4.2 86.08,70.6 94.5,70.6 96.1,69 R29.2 96.1,59.62 R28.1
Y_OUT: U4.3 U5.5 | length 31.4
  Bottom Layer w0.5: U4.3 90.399,76.039 90.399,80.411 92.988,83 108.06,83 U5.5
pads on no net: P3.4 P3.6 U1.1 U1.2 U1.12 U1.15 U2.11 U2.12 U2.13 U2.14 U3.4 U3.5 U3.6 U3.8 U3.9 U3.10 U3.11 U3.12 U3.13 U5.11 U5.12 U5.13 U5.14 U5.15 U9.1 U9.2 U9.3 U9.4 U9.13 U9.14 U9.15 U9.16 U9.17 U9.18 U9.19 U9.20
copper on no net:
  other v1: 4,4 121.1,4 3.9,96 121,96.1

## Polygon pours and split planes (outlines as drawn)
GND on Bottom Layer "GND_L02_P000" (solid, remove dead copper, pour order 0): 164.106,100.337 164.206,100.437 289.106,100.437 289.106,0.237 289.006,0.337 164.106,0.337

## Keep-outs
Keep-Out Layer:
  lines w0.254: 0,0.1 8.5,0.1 8.5,8 0,8 0,0.1 ; 0,91.5 0,100 7.9,100 7.9,91.5 0,91.5 ; 116.5,92.1 125,92.1 125,100 116.5,100 116.5,92.1 ; 117.1,0 117.1,8.5 125,8.5 125,0 117.1,0

## Silkscreen, mask and mechanical layers (free items; w line width, h text height)
Mechanical 1:
  the board outline again, w0.254

## Text inside footprints (layer, text, board x,y; h text height)
C1: Top Overlay "+" at 24.564,45.662 h1.52 r180
C3: Top Overlay "+" at 8.662,52.736 h1.52 r90
C17: Top Overlay "+" at 51.738,92.264 h1.52 r270
C22: Top Overlay "+" at 19.038,20.264 h1.52 r270
C24: Top Overlay "+" at 17.438,10.264 h1.52 r270
C26: Top Overlay "+" at 20.962,21.336 h1.52 r90
C27: Top Overlay "+" at 111.836,38.838 h1.52
D1: Top Overlay "+" at 31.938,17.226 h1.52 r270
D2: Top Overlay "+" at 33.162,18.574 h1.52 r90